# Altium PCB PCB.pcbdoc
Units mil, origin at the board's own origin, x right, y up, seen from the top; angles counter-clockwise.
Board outline 1574.8 x 2362.2 mil, 2 copper layers (Top Layer, Bottom Layer), stack 62.2 mil thick; 34 components, 25 nets, 135 pads, 34 vias.
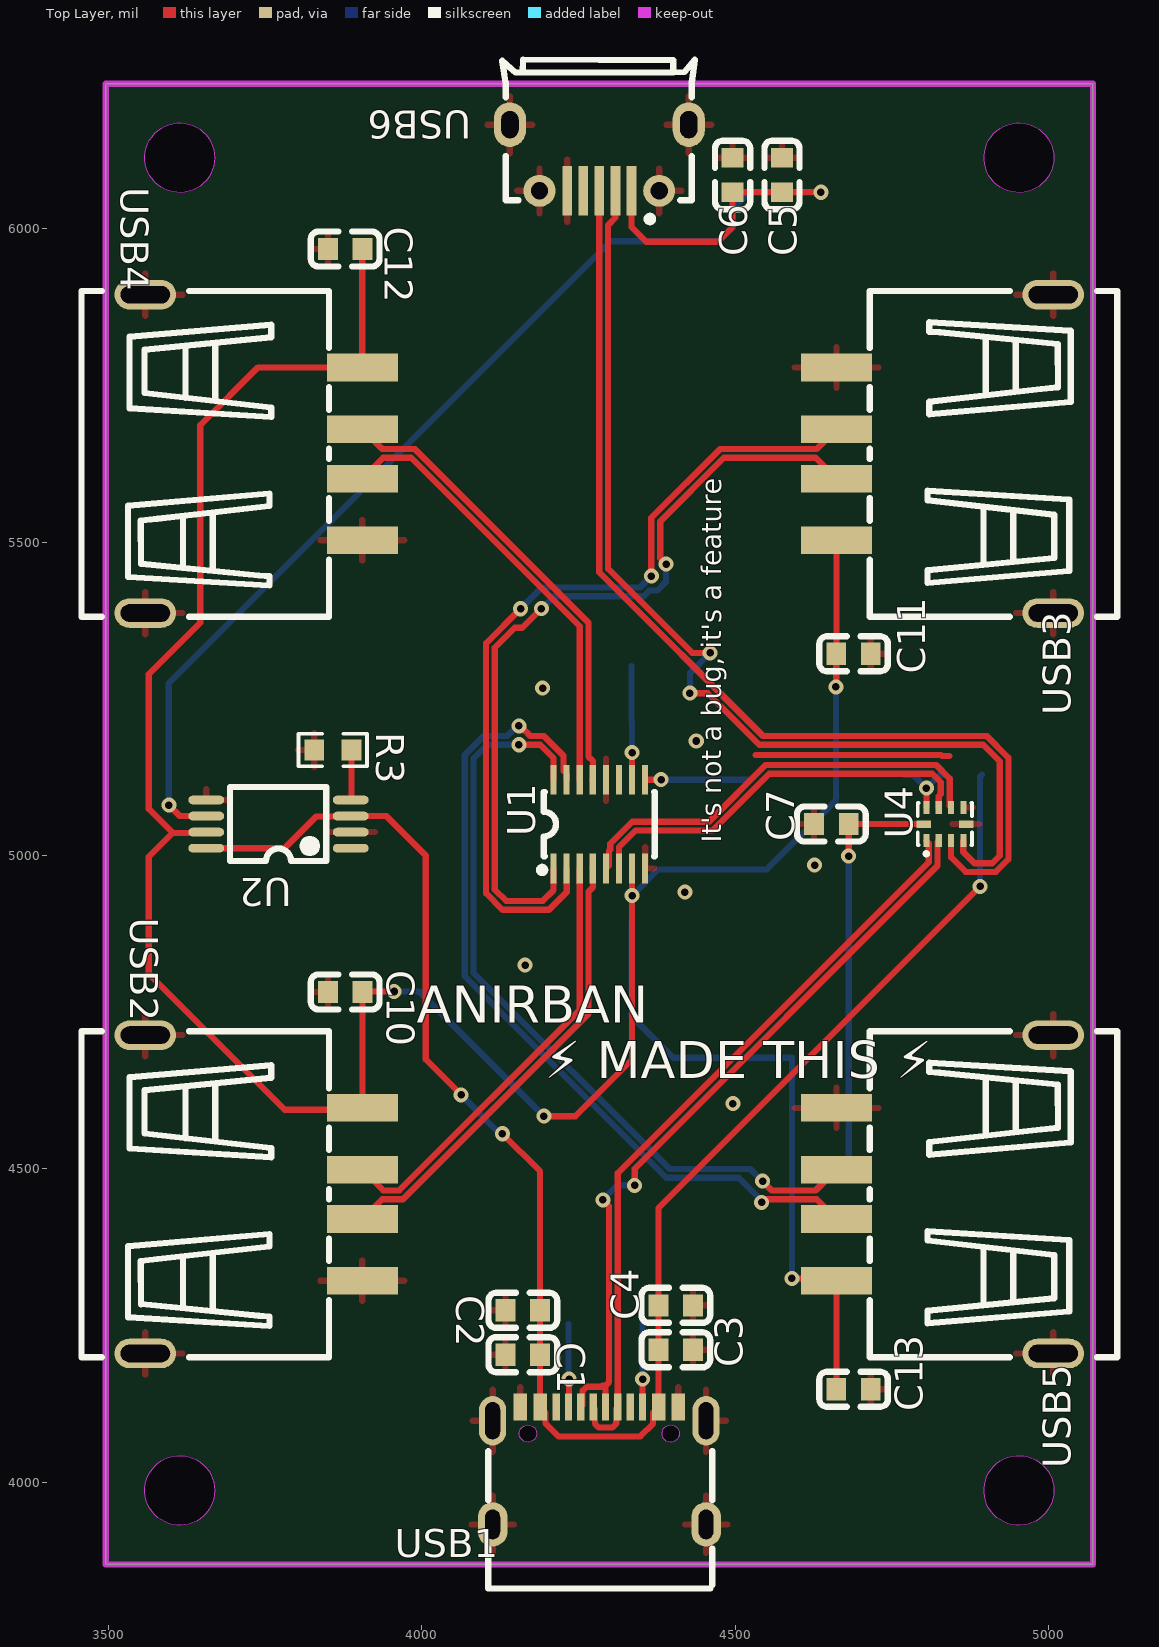
[diagram p0: Top Layer view]
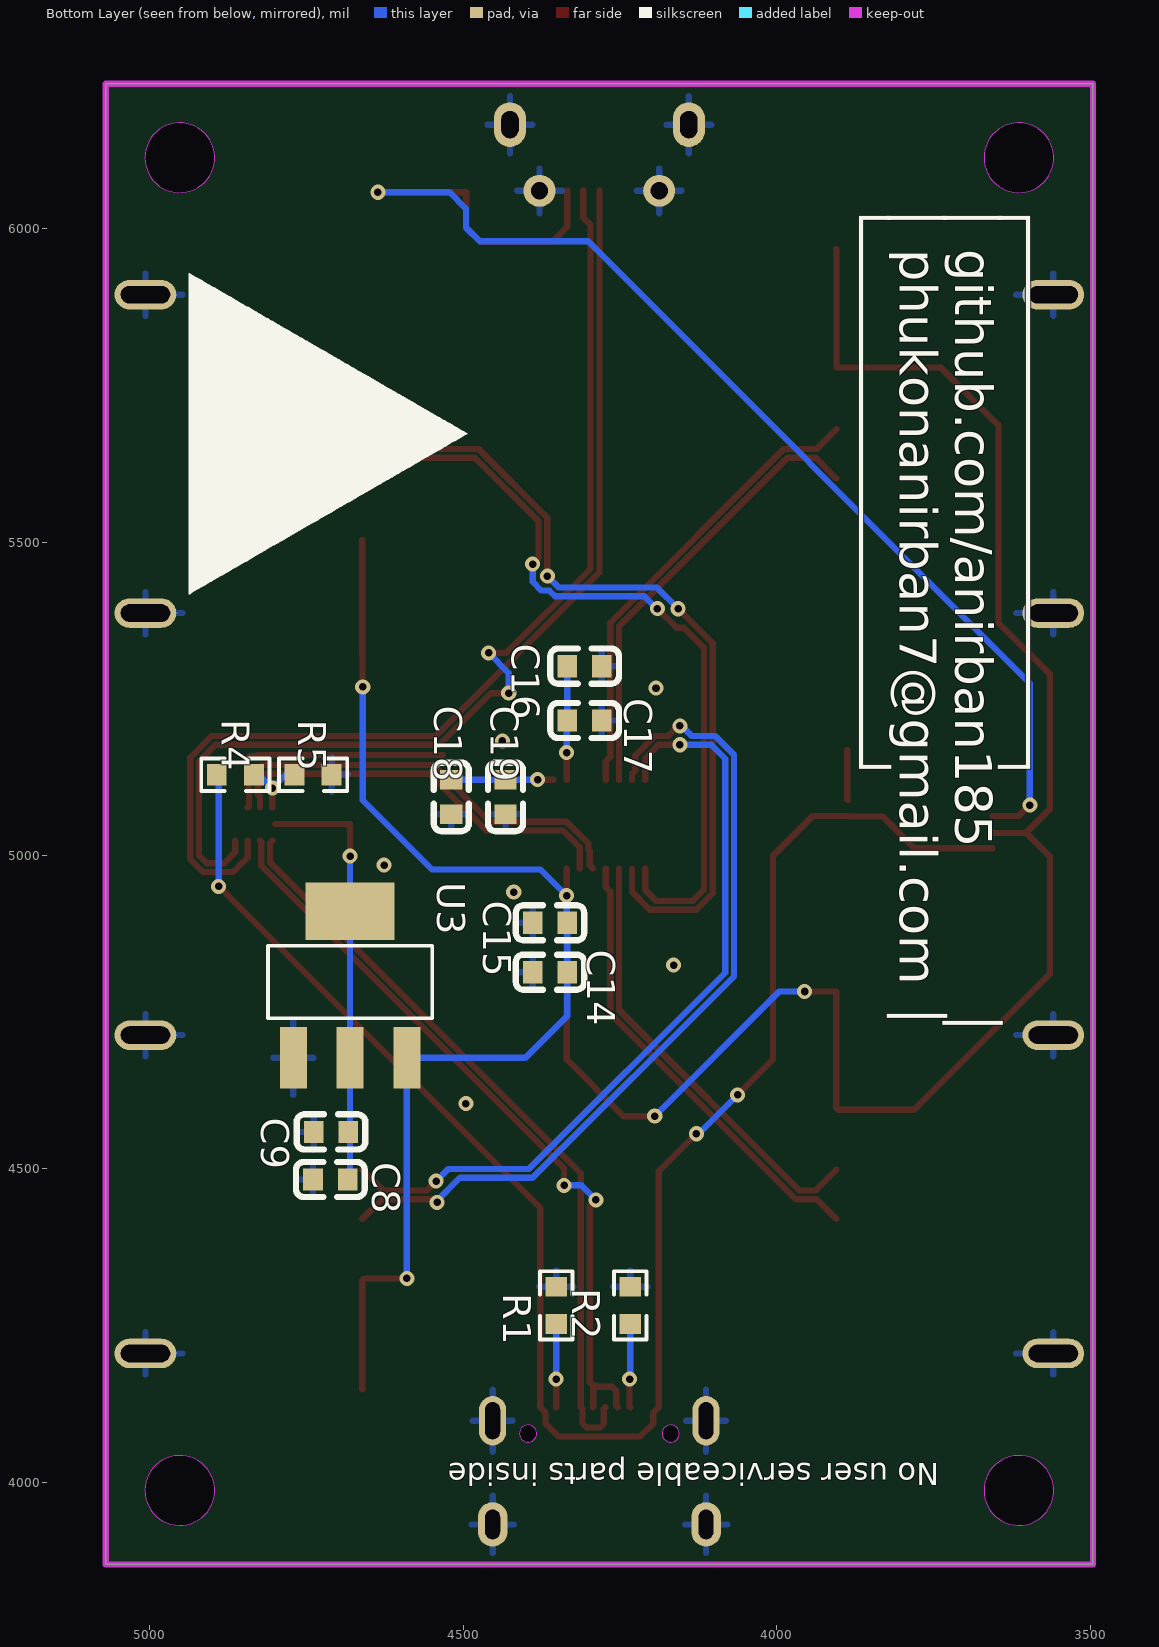
[diagram p1: Bottom Layer view, seen from below]

## Layer stack, top to bottom
Top Solder Mask Layer: solder mask 0.4, Dk 3.3
Top Layer: signal copper 1.4
Dielectric1: surface 59.4, FR4, Dk 4.5
Bottom Layer: signal copper 1.4
Bottom Solder Mask Layer: solder mask 0.4, Dk 3.3

## Board outline
3495.6,6231.3 3495.6,3869.1 5070.4,3869.1 5070.4,6231.3
cut-out: 3669.4,3987.2 3669,3980.6 3667.9,3974.1 3665.9,3967.8 3663.3,3961.7 3659.9,3956.1 3655.9,3950.8 3651.3,3946.1 3646.2,3941.9 3640.6,3938.4 3634.7,3935.6 3628.4,3933.5 3622,3932.1 3615.4,3931.5 3608.8,3931.7 3602.3,3932.7 3595.9,3934.4 3589.8,3936.9 3584,3940.1 3578.7,3943.9 3573.8,3948.4 3569.5,3953.4 3565.8,3958.9 3562.8,3964.7 3560.5,3970.9 3558.9,3977.3 3558.2,3983.9 3558.2,3990.5 3558.9,3997 3560.5,4003.4 3562.8,4009.6 3565.8,4015.5 3569.5,4021 3573.8,4026 3578.7,4030.4 3584,4034.3 3589.8,4037.4 3595.9,4039.9 3602.3,4041.7 3608.8,4042.6 3615.4,4042.8 3622,4042.2 3628.4,4040.9 3634.7,4038.8 3640.6,4035.9 3646.2,4032.4 3651.3,4028.3 3655.9,4023.5 3659.9,4018.3 3663.3,4012.6 3665.9,4006.6 3667.9,4000.2 3669,3993.8
cut-out: 5008,3987.2 5007.6,3980.6 5006.4,3974.1 5004.5,3967.8 5001.9,3961.7 4998.5,3956.1 4994.5,3950.8 4989.9,3946.1 4984.8,3941.9 4979.2,3938.4 4973.2,3935.6 4967,3933.5 4960.5,3932.1 4954,3931.5 4947.4,3931.7 4940.9,3932.7 4934.5,3934.4 4928.4,3936.9 4922.6,3940.1 4917.2,3943.9 4912.4,3948.4 4908.1,3953.4 4904.4,3958.9 4901.4,3964.7 4899.1,3970.9 4897.5,3977.3 4896.7,3983.9 4896.7,3990.5 4897.5,3997 4899.1,4003.4 4901.4,4009.6 4904.4,4015.5 4908.1,4021 4912.4,4026 4917.2,4030.4 4922.6,4034.3 4928.4,4037.4 4934.5,4039.9 4940.9,4041.7 4947.4,4042.6 4954,4042.8 4960.5,4042.2 4967,4040.9 4973.2,4038.8 4979.2,4035.9 4984.8,4032.4 4989.9,4028.3 4994.5,4023.5 4998.5,4018.3 5001.9,4012.6 5004.5,4006.6 5006.4,4000.2 5007.6,3993.8
cut-out: 5008,6113.2 5007.6,6106.6 5006.4,6100.1 5004.5,6093.8 5001.9,6087.7 4998.5,6082.1 4994.5,6076.8 4989.9,6072.1 4984.8,6067.9 4979.2,6064.4 4973.2,6061.6 4967,6059.4 4960.5,6058.1 4954,6057.5 4947.4,6057.7 4940.9,6058.7 4934.5,6060.4 4928.4,6062.9 4922.6,6066.1 4917.2,6069.9 4912.4,6074.4 4908.1,6079.4 4904.4,6084.8 4901.4,6090.7 4899.1,6096.9 4897.5,6103.3 4896.7,6109.9 4896.7,6116.5 4897.5,6123 4899.1,6129.4 4901.4,6135.6 4904.4,6141.5 4908.1,6146.9 4912.4,6151.9 4917.2,6156.4 4922.6,6160.2 4928.4,6163.4 4934.5,6165.9 4940.9,6167.6 4947.4,6168.6 4954,6168.8 4960.5,6168.2 4967,6166.9 4973.2,6164.8 4979.2,6161.9 4984.8,6158.4 4989.9,6154.2 4994.5,6149.5 4998.5,6144.3 5001.9,6138.6 5004.5,6132.5 5006.4,6126.2 5007.6,6119.7
cut-out: 3669.4,6113.2 3669,6106.6 3667.9,6100.1 3665.9,6093.8 3663.3,6087.7 3659.9,6082.1 3655.9,6076.8 3651.3,6072.1 3646.2,6067.9 3640.6,6064.4 3634.7,6061.6 3628.4,6059.4 3622,6058.1 3615.4,6057.5 3608.8,6057.7 3602.3,6058.7 3595.9,6060.4 3589.8,6062.9 3584,6066.1 3578.7,6069.9 3573.8,6074.4 3569.5,6079.4 3565.8,6084.8 3562.8,6090.7 3560.5,6096.9 3558.9,6103.3 3558.2,6109.9 3558.2,6116.5 3558.9,6123 3560.5,6129.4 3562.8,6135.6 3565.8,6141.5 3569.5,6146.9 3573.8,6151.9 3578.7,6156.4 3584,6160.2 3589.8,6163.4 3595.9,6165.9 3602.3,6167.6 3608.8,6168.6 3615.4,6168.8 3622,6168.2 3628.4,6166.9 3634.7,6164.8 3640.6,6161.9 3646.2,6158.4 3651.3,6154.2 3655.9,6149.5 3659.9,6144.3 3663.3,6138.6 3665.9,6132.5 3667.9,6126.2 3669,6119.7

## Design rules (kind name [scope] priority, off if disabled: settings)
BoardOutlineClearance copperThickness1oz [All] p0: genericclearance=10 ignorepadtopadclearanceinfootprint=FALSE except(0: Arc-SplitContinuation Track-SplitContinuation SMDPad-SplitContinuation THPad-SplitContinuation Via-SplitContinuation Fill-SplitContinuation Poly-SplitContinuation Region-SplitContinuation Text-SplitContinuation)
BoardOutlineClearance copperThickness2oz [All] p0: genericclearance=10 ignorepadtopadclearanceinfootprint=FALSE except(0: Arc-SplitContinuation Track-SplitContinuation SMDPad-SplitContinuation THPad-SplitContinuation Via-SplitContinuation Fill-SplitContinuation Poly-SplitContinuation Region-SplitContinuation Text-SplitContinuation)
BoardOutlineClearance otherClearance [All] p0: genericclearance=10 ignorepadtopadclearanceinfootprint=FALSE except(0: Arc-SplitContinuation Track-SplitContinuation SMDPad-SplitContinuation THPad-SplitContinuation Via-SplitContinuation Fill-SplitContinuation Poly-SplitContinuation Region-SplitContinuation Text-SplitContinuation)
Clearance copperThickness1oz [All] p1: gap=7 ignorepadtopadclearanceinfootprint=FALSE
Clearance copperThickness2oz [All] p1: gap=7 ignorepadtopadclearanceinfootprint=FALSE
Clearance otherClearance [All] p1: gap=7 ignorepadtopadclearanceinfootprint=FALSE
DiffPairsRouting differentialPair [All] p1: maxuncoupledlength=10 minlimit=6 maxlimit=Infinity mostfreqgap=6 toplayer_minwidth=5 toplayer_prefwidth=10 toplayer_maxwidth=100 bottomlayer_minwidth=5 bottomlayer_prefwidth=10 bottomlayer_maxwidth=100
PasteMaskExpansion pasteMaskExpansion [All] p1: expansion=0
PlaneConnect innerPlane [All] p1: planeconnectstyle=Relief reliefexpansion=20 reliefentries=4 reliefconductorwidth=10 reliefairgap=10
PolygonConnect copperRegion [All] p1: connectstyle=Relief reliefentries=4 reliefconductorwidth=10 polygonreliefangle="90 Angle" airgapwidth=10
RoutingVias viaSize [All] p1: viastyle="Through Hole" holewidth=12.0078 minholewidth=11.811 maxholewidth=248.0314 width=12.0078 minwidth=11.811 maxwidth=248.0314
SolderMaskExpansion solderMaskExpansion [IsVia] p1: useseparateexpansions=TRUE expansion=-1000 expansionbottom=-1000
SolderMaskExpansion solderMaskExpansion [All] p2: useseparateexpansions=TRUE expansion=2 expansionbottom=2
Width copperThickness1oz [All] p1: maxlimit=100 minlimit=5 preferedwidth=10
Width copperThickness2oz [All] p1: maxlimit=100 minlimit=8 preferedwidth=10

## Components (designator, comment, footprint, x,y, rotation, side; value= is the part's Value field where it differs from the comment)
C1 "1uF" C0603#1 4161,4203.7 r0 top
C2 "100uF" C0603#1 4161,4274.6 r0 top
C3 "1uF" C0603#2 4405.1,4211.6 r180 top
C4 "100uF" C0603#2 4405.1,4282.4 r180 top
C5 "1uF" C0603#3 4574.4,6085.6 r270 top
C6 "100uF" C0603#3 4495.6,6085.6 r270 top
C7 "100nF" C0603#2 4653.1,5050.2 r0 top
C8 "1uF" C0603#2 4712.2,4483.2 r180 bottom
C9 "100uF" C0603#1 4711.1,4559.1 r180 bottom
C10 "100nF" C0603#2 3877.5,4782.4 r0 top
C11 "100nF" C0603#1 4688.5,5321.8 r180 top
C12 "100nF" C0603#2 3877.5,5967.5 r0 top
C13 "100nF" C0603#1 4688.5,4148.6 r180 top
C14 "1uF" C0603#2 4361.8,4813.9 r180 bottom
C15 "100uF" C0603#2 4361.8,4892.7 r180 bottom
C16 "1uF" C0603#1 4306.7,5302.1 r0 bottom
C17 "100uF" C0603#1 4306.7,5215.5 r0 bottom
C18 "1uF" C0603#1 4432.6,5093.5 r90 bottom
C19 "100uF" C0603#1 4519.3,5093.5 r90 bottom
R1 "10K" R0603#1 4351.9,4282.4 r270 bottom
R2 "10K" R0603#1 4233.8,4282.4 r270 bottom
R3 "10K" R0603#2 3857.8,5168.3 r0 top
R4 "10K" R0603#2 4863.7,5128.9 r0 bottom
R5 "20K" R0603#2 4739.7,5128.9 r0 bottom
U1 "SL2.1s" SSOP-16_L4.6-W2.6-P0.53-LS4.0-BL 4283,5050.2 r0 top
U2 "TPS2113APWR" TSSOP-8_L4.4-W3.0-P0.65-LS6.4-BL 3771.2,5050.2 r90 top
U3 "AMS1117-3.3" SOT-223-3_L6.5-W3.4-P2.30-LS7.0-BR 4680.7,4794.3 r270 bottom
U4 "TS3USB221RSER" UQFN-10_L2.0-W1.5-P0.50-BL 4834.2,5050.2 r0 top
USB1 "TYPE-C 16PIN 2MD(073)" USB-C-SMD_TYPE-C-16PIN-2MD-073 4283,4026.5 r0 top
USB2 "10.0 QHHTZB6.3" USB-A-TH_10.0QHHTZB6.3#1 3731.9,4459.6 r270 top
USB3 "10.0 QHHTZB6.3" USB-A-TH_10.0QHHTZB6.3#2 4834.2,5640.7 r90 top
USB4 "10.0 QHHTZB6.3" USB-A-TH_10.0QHHTZB6.3#3 3731.9,5640.7 r270 top
USB5 "10.0 QHHTZB6.3" USB-A-TH_10.0QHHTZB6.3#4 4834.2,4459.6 r90 top
USB6 "MicroXNJ" MICRO-USB-SMD_MICROXNJ_1 4283,6113.2 r90 top

## Footprints (in the part's own frame and the unit in brackets; to place one, negate y for a bottom-side part, rotate by r counter-clockwise, add the part's x,y. Pads: shape width x height; smd on the part's side, far side on the other; paste and mask are expansions set on the pad)
C0603#1 [mil]
  rect 31.5x35.4 smd: 1(-27.6,0) 2(27.5,0)
  silkscreen extent -55,-28 55,28
C0603#2 [mil]
  rect 31.5x35.4 smd: 1(-27.5,0) 2(27.6,0)
  silkscreen extent -55,-28 55,28
C0603#3 [mil]
  rect 31.5x35.4 smd: 1(-27.6,0) 2(27.6,0)
  silkscreen extent -55,-28 55,28
MICRO-USB-SMD_MICROXNJ_1 [mil]
  rect 78.7x15.7 smd paste-3937 mask+2: 1(-52.5,-51.2) 2(-52.5,-25.6) 3(-52.5,0) 4(-52.5,25.6) 5(-52.5,51.1)
  round 51.2 hole 27.6 paste+0 mask+2: 6(-52.8,95.4) 9(-52.8,-95.5)
  oval 70.9x51.2 hole 27.6 slot 43.3 at 0 deg paste+0 mask+2: 7(52.7,142.7) 8(52.7,-142.7)
  Inner2 lines w3.9: -164.9,-310.9 cw(c-162.9,-310.9) -160.9,-310.9 cw(c-162.9,-310.9) -164.9,-310.9
  silkscreen extent -103,-152 157,155
R0603#1 [mil]
  rect 31.8x34 smd paste-3937 mask+2: 1(-29.7,0) 2(29.6,0)
  silkscreen extent -55,-26 55,26
R0603#2 [mil]
  rect 31.8x34 smd paste-3937 mask+2: 1(-29.6,0) 2(29.7,0)
  silkscreen extent -54,-26 55,26
SOT-223-3_L6.5-W3.4-P2.30-LS7.0-BR [mil]
  rect 98.4x43.3 smd: 1(117,-90.5) 2(117,0) 3(117,90.6)
  rect 92.1x141.7 smd: 4(-116.9,0)
  silkscreen extent -62,-131 54,131
SSOP-16_L4.6-W2.6-P0.53-LS4.0-BL [mil]
  rect 9.8x47.2 smd paste+0 mask+2: 1(-73,-70.9) 2(-52.1,-70.9) 3(-31.3,-70.9) 4(-10.4,-70.9) 5(10.5,-70.9) 6(31.3,-70.9) 7(52.2,-70.9) 8(73.1,-70.9) 9(73.1,70.8) 10(52.2,70.8) 11(31.3,70.8) 12(10.5,70.8) 13(-10.4,70.8) 14(-31.3,70.8) 15(-52.1,70.8) 16(-73,70.8)
  silkscreen extent -96,-78 89,51
TSSOP-8_L4.4-W3.0-P0.65-LS6.4-BL [mil]
  oval 13.9x57.2 smd: 1(-38.4,-115.3) 2(-12.8,-115.3) 3(12.8,-115.3) 4(38.4,-115.3) 5(38.4,115.2) 6(12.8,115.2) 7(-12.8,115.2) 8(-38.4,115.2)
  silkscreen extent -59,-76 59,77
UQFN-10_L2.0-W1.5-P0.50-BL [mil]
  rect 9.8x20.7 smd: 1(-29.5,-26.6) 2(-9.8,-26.6) 3(9.9,-26.6) 4(29.5,-26.6) 6(29.5,26.5) 7(9.9,26.5) 8(-9.8,26.5) 9(-29.5,26.5)
  rect 22.8x11.8 smd: 5(33.9,0) 10(-33.8,0)
  silkscreen extent -43,-50 43,33
USB-A-TH_10.0QHHTZB6.3#1 [mil]
  rect 44.1x113.4 smd paste-3937 mask+2: 1(-137.8,173) 2(-39.4,173) 3(39.4,173) 4(137.8,173)
  oval 47.2x98.4 hole 27.6 slot 78.7 at 90 deg: 5(-253.9,-173.1) 6(253.9,-173.1)
  silkscreen extent -260,-275 260,120
USB-A-TH_10.0QHHTZB6.3#2 [mil]
  rect 44.1x113.4 smd paste-3937 mask+2: 1(-137.8,173) 2(-39.4,173) 3(39.4,173) 4(137.8,173)
  oval 47.2x98.4 hole 27.6 slot 78.7 at 90 deg: 5(-253.9,-173) 6(254,-173)
  silkscreen extent -260,-275 260,120
USB-A-TH_10.0QHHTZB6.3#3 [mil]
  rect 44.1x113.4 smd paste-3937 mask+2: 1(-137.8,173) 2(-39.4,173) 3(39.4,173) 4(137.8,173)
  oval 47.2x98.4 hole 27.6 slot 78.7 at 90 deg: 5(-254,-173.1) 6(253.9,-173.1)
  silkscreen extent -260,-275 260,120
USB-A-TH_10.0QHHTZB6.3#4 [mil]
  rect 44.1x113.4 smd paste-3937 mask+2: 1(-137.8,173) 2(-39.4,173) 3(39.4,173) 4(137.8,173)
  oval 47.2x98.4 hole 27.6 slot 78.7 at 90 deg: 5(-253.9,-173) 6(253.9,-173)
  silkscreen extent -260,-275 260,120
USB-C-SMD_TYPE-C-16PIN-2MD-073 [mil]
  oval 47.2x70.9 hole 23.6 slot 47.2 at 90 deg paste+0 mask+2: 13(-170.2,-93.5) 14(170.3,-93.5)
  oval 43.3x78.7 hole 23.6 slot 59.1 at 90 deg paste+0 mask+2: 13(-170.2,71.9) 14(170.3,71.9)
  rect 21.7x43.3 smd paste+0 mask+2: A1B12(-125.9,93.5) A4B9(-94.5,93.5) B1A12(126,93.5) B4A9(94.5,93.5)
  rect 11.8x43.3 smd paste+0 mask+2: A5(-49.2,93.5) A6(-9.8,93.5) A7(9.9,93.5) A8(49.2,93.5) B5(68.9,93.5) B6(29.6,93.5) B7(-29.5,93.5) B8(-68.9,93.5)
  Board Outline Layer lines w0.1: -127.4,49.8 -126.7,46.7 -125.3,43.8 -123.2,41.4 -120.6,39.5 -117.7,38.2 -114.5,37.7 -111.4,37.8 -108.3,38.8 -105.5,40.4 -103.2,42.6 -101.4,45.2 -100.3,48.2 -100,51.4 -100.3,54.6 -101.4,57.6 -103.2,60.3 -105.5,62.5 -108.3,64.1 -111.4,65 -114.5,65.2 -117.7,64.6 -120.6,63.4 -123.2,61.4 -125.3,59 -126.7,56.1 -127.4,53 -127.4,49.8 ; 100.1,49.8 100.9,46.7 102.3,43.8 104.4,41.4 106.9,39.5 109.9,38.2 113,37.7 116.2,37.8 119.3,38.8 122,40.4 124.4,42.6 126.1,45.2 127.2,48.2 127.6,51.4 127.2,54.6 126.1,57.6 124.4,60.3 122,62.5 119.3,64.1 116.2,65 113,65.2 109.9,64.6 106.9,63.4 104.4,61.4 102.3,59 100.9,56.1 100.1,53 100.1,49.8
  Board Outline Layer region: -100,51.4 -100.3,48.2 -101.4,45.2 -103.2,42.6 -105.5,40.4 -108.3,38.8 -111.4,37.8 -114.5,37.7 -117.7,38.2 -120.6,39.5 -123.2,41.4 -125.3,43.8 -126.7,46.7 -127.4,49.8 -127.4,53 -126.7,56.1 -125.3,59 -123.2,61.4 -120.6,63.4 -117.7,64.6 -114.5,65.2 -111.4,65 -108.3,64.1 -105.5,62.5 -103.2,60.3 -101.4,57.6 -100.3,54.6
  Board Outline Layer region: -100,51.4 -100.3,48.2 -101.4,45.2 -103.2,42.6 -105.5,40.4 -108.3,38.8 -111.4,37.8 -114.5,37.7 -117.7,38.2 -120.6,39.5 -123.2,41.4 -125.3,43.8 -126.7,46.7 -127.4,49.8 -127.4,53 -126.7,56.1 -125.3,59 -123.2,61.4 -120.6,63.4 -117.7,64.6 -114.5,65.2 -111.4,65 -108.3,64.1 -105.5,62.5 -103.2,60.3 -101.4,57.6 -100.3,54.6
  Board Outline Layer region: 127.6,51.4 127.2,48.2 126.1,45.2 124.4,42.6 122,40.4 119.3,38.8 116.2,37.8 113,37.7 109.9,38.2 106.9,39.5 104.4,41.4 102.3,43.8 100.9,46.7 100.1,49.8 100.1,53 100.9,56.1 102.3,59 104.4,61.4 106.9,63.4 109.9,64.6 113,65.2 116.2,65 119.3,64.1 122,62.5 124.4,60.3 126.1,57.6 127.2,54.6
  Board Outline Layer region: 127.6,51.4 127.2,48.2 126.1,45.2 124.4,42.6 122,40.4 119.3,38.8 116.2,37.8 113,37.7 109.9,38.2 106.9,39.5 104.4,41.4 102.3,43.8 100.9,46.7 100.1,49.8 100.1,53 100.9,56.1 102.3,59 104.4,61.4 106.9,63.4 109.9,64.6 113,65.2 116.2,65 119.3,64.1 122,62.5 124.4,60.3 126.1,57.6 127.2,54.6
  Multi-Layer board cut-out: -100,51.4 -100.3,48.2 -101.4,45.2 -103.2,42.6 -105.5,40.4 -108.3,38.8 -111.4,37.8 -114.5,37.7 -117.7,38.2 -120.6,39.5 -123.2,41.4 -125.3,43.8 -126.7,46.7 -127.4,49.8 -127.4,53 -126.7,56.1 -125.3,59 -123.2,61.4 -120.6,63.4 -117.7,64.6 -114.5,65.2 -111.4,65 -108.3,64.1 -105.5,62.5 -103.2,60.3 -101.4,57.6 -100.3,54.6
  Multi-Layer board cut-out: 127.6,51.4 127.2,48.2 126.1,45.2 124.4,42.6 122,40.4 119.3,38.8 116.2,37.8 113,37.7 109.9,38.2 106.9,39.5 104.4,41.4 102.3,43.8 100.9,46.7 100.1,49.8 100.1,53 100.9,56.1 102.3,59 104.4,61.4 106.9,63.4 109.9,64.6 113,65.2 116.2,65 119.3,64.1 122,62.5 124.4,60.3 126.1,57.6 127.2,54.6
  silkscreen extent -177,-196 180,24

## Via types
v1: diameter 24, hole 12, Top Layer to Bottom Layer, 34 vias

## Nets (pads, with @x,y where several pads share a name; then routed paths per layer and width w, separated by ;. In a path a pad name is that pad's centre, name@x,y a point inside that pad or via, vN(x,y) a via of type N, cw(c..) or ccw(c..) an arc to the next point about the centre after c; other vN are vias at no path point)
$1N8: R1.2 USB1.B5 | length 132.8
  Top Layer w10: USB1.B5 v1(4351.9,4164.7)
  Bottom Layer w10: v1(4351.9,4164.7) R1.2
$1N10: R2.2 USB1.A5 | length 133.6
  Top Layer w10: USB1.A5 4234.8,4121.1 v1(4234.8,4164.7)
  Bottom Layer w10: R2.2 4233.8,4165.7 v1(4234.8,4164.7)
$1N34: R3.2 U2.4 | length 80.1
  Top Layer w10: U2.4 3887.5,5089.6 R3.2
$1N46: R4.1 R5.2 U4.9 | length 113.3
  Top Layer w10: U4.9 4804.8,5076.8 v1(4804.8,5107.5)
  Bottom Layer w10: R5.2 4783.4,5128.9 v1(4804.8,5107.5) 4826.2,5128.9 R4.1
$1N103: C16.2 C17.2 U1.10 | length 181.5
  Top Layer w10: U1.10 v1(4335.2,5164.3)
  Bottom Layer w10: C16.2 C17.2 4335.2,5214.5 v1(4335.2,5164.3)
$1N104: C18.2 C19.2 U1.9 | length 163.2
  Top Layer w10: U1.9 v1(4381.5,5121)
  Bottom Layer w10: v1(4381.5,5121) C18.2 C19.2
+3.3V: C7.2 C8.2 C9.2 U3.2 U3.4 U4.10 | length 688.3
  Top Layer w10: v1(4680.7,4999) C7.2 U4.10
  Bottom Layer w10: v1(4680.7,4999) U3.4 U3.2 4680.7,4487.2 C8.2
+5V: C10.2 C11.2 C12.2 C13.2 C14.2 C15.2 U1.7 U2.7 U3.3 USB2.1 USB3.1 USB4.1 USB5.1 | length 4829.5
  Top Layer w10: U2.7 3654.7,5036.1 3602.4,5036.1 ; C12.2 3904.9,5967.3 USB4.1 3738.4,5778.5 3646.5,5686.7 3646.5,5371.4 3564.2,5289.1 3564.2,5074.3 3602.4,5036.1 ; v1(3955.7,4783.1) 3905.7,4783.1 C10.2 3905.1,4597.6 USB2.1 3901.9,4594.4 3781.1,4594.4 3564.2,4811.2 3564.2,4998 3602.4,5036.1 ; v1(4194.7,4584.3) 4244.9,4584.3 4335.2,4674.7 v1(4335.2,4936) U1.7 ; v1(4590.2,4325.3) 4657.7,4325.3 USB5.1 4661.2,4148.8 C13.2 ; v1(4660.5,5269) 4661,5269.5 C11.2 4661.2,5322 USB3.1
  Bottom Layer w10: v1(3955.7,4783.1) 3995.9,4783.1 v1(4194.7,4584.3) ; v1(4590.2,4325.3) 4590.2,4677.2 U3.3 4400.9,4677.3 4334.2,4744 C14.2 C15.2 4335.2,4893.7 v1(4335.2,4936) 4377.1,4977.9 4550.1,4977.9 4660.5,5088.3 v1(4660.5,5269)
DN: U1.5 U4.7 | length 692
  Top Layer w10: U1.5 4298.4,4984.3 4298.4,5007.5 4300.3,5009.4 4300.3,5019 4335.5,5054.1 4457.9,5054.1 4548.3,5144.5 4820.1,5144.5 4841.8,5122.8 4841.8,5079 U4.7
DN1: U1.3 USB2.2 | length 705.5
  Top Layer w10: USB2.2 3938,4465.8 3964,4465.8 4251.7,4753.6 U1.3
DN2: U1.1 USB3.2 | length 1282.5
  Top Layer w10: v1(4190.4,5393.9) 4159.8,5363.3 4148.2,5363.3 4116.3,5331.5 4116.3,4945.5 4134.2,4927.6 4192.7,4927.6 4210,4945 U1.1 ; v1(4389.4,5464.7) 4380,5474.1 4380,5532.9 4481.6,5634.5 4628,5634.5 USB3.2
  Bottom Layer w10: v1(4190.4,5393.9) 4191.4,5393.9 4211.2,5413.6 4353.7,5413.6 4362.8,5422.7 4375.5,5422.7 4389.4,5436.6 v1(4389.4,5464.7)
DN3: U1.15 USB5.2 | length 1349
  Top Layer w10: v1(4154.5,5206.7) 4161.5,5199.7 4164.1,5199.7 4173,5190.7 4194.5,5190.7 4225.9,5159.2 4225.9,5135.3 4230.9,5130.3 U1.15 ; v1(4542,4446.7) 4547,4451.7 4629.7,4451.7 USB5.2
  Bottom Layer w10: v1(4154.5,5206.7) 4152,5206.7 4136,5190.7 4098.5,5190.7 4068.2,5160.4 4068.2,4807.4 4389.7,4486 4505.5,4486 4542,4449.4 v1(4542,4446.7)
DN4: U1.13 USB4.2 | length 742.3
  Top Layer w10: USB4.2 3936.5,5648.5 3988.6,5648.5 4265.7,5371.4 4265.7,5157.8 4273,5150.6 4273,5121.4 U1.13
DN-C: U4.2 USB1.A7 USB1.B7 | length 1215.6
  Top Layer w10: USB1.B7 4256.3,4122.8 4256.3,4146.3 4262.7,4152.7 4286.1,4152.7 4287.9,4154.5 4292.9,4154.5 ; v1(4288.6,4450.8) 4298.5,4440.8 4298.5,4160.1 4292.9,4154.5 ; USB1.A7 4292.9,4154.5 ; v1(4339.3,4473.9) 4339.3,4500.3 4822.5,4983.5 4822.5,5021.7 U4.2
  Bottom Layer w10: v1(4288.6,4450.8) 4311.7,4473.9 v1(4339.3,4473.9)
DN-M: U4.4 USB6.2 | length 1681.7
  Top Layer w10: USB6.2 4308.6,6017.5 4297,6005.9 4297,5457.5 4431.4,5323.2 v1(4459.7,5323.2) ; v1(4427.6,5259) 4456,5259 4538.2,5176.7 4895.4,5176.7 4921.6,5150.5 4921.6,4999.7 4909.6,4987.8 4881.5,4987.8 4863.7,5005.6 U4.4
  Bottom Layer w10: v1(4427.6,5259) 4427.6,5291.1 v1(4459.7,5323.2)
DP: U1.6 U4.8 | length 643.3
  Top Layer w10: U1.6 4314.3,5013.2 4341.3,5040.1 4463.7,5040.1 4554.1,5130.5 4814.3,5130.5 4827.8,5117 4827.8,5098 4824.4,5094.6 U4.8
DP1: U1.4 USB2.3 | length 731.2
  Top Layer w10: USB2.3 3936.5,4451.8 3969.8,4451.8 4265.7,4747.8 4265.7,4942.5 4273,4949.8 4273,4978.9 U1.4
DP2: U1.2 USB3.3 | length 1342.4
  Top Layer w10: v1(4157.3,5393.7) 4102.3,5338.7 4102.3,4939.7 4128.4,4913.6 4202.7,4913.6 4230.9,4941.8 U1.2 ; v1(4366,5445.7) 4366,5538.7 4475.8,5648.5 4629.6,5648.5 USB3.3
  Bottom Layer w10: v1(4157.3,5393.7) 4191.3,5427.6 4347.9,5427.6 v1(4366,5445.7)
DP3: U1.16 USB5.3 | length 1258.3
  Top Layer w10: v1(4154.5,5176.7) 4188.7,5176.7 4210,5155.3 U1.16 ; v1(4543.5,4480.5) 4558.3,4465.7 4627.9,4465.7 USB5.3
  Bottom Layer w10: v1(4154.5,5176.7) 4104.3,5176.7 4082.2,5154.6 4082.2,4813.2 4395.5,4500 4524,4500 v1(4543.5,4480.5)
DP4: U1.14 USB4.3 | length 716.6
  Top Layer w10: USB4.3 3938,5634.5 3982.9,5634.5 4251.7,5365.6 U1.14
DP-C: U4.1 USB1.A6 USB1.B6 | length 1204.4
  Top Layer w10: USB1.A6 4276,4117.2 4276,4093.8 4282.4,4087.4 4303.3,4087.4 4309.8,4093.8 4309.8,4117.3 USB1.B6 4312.6,4493.4 4808.5,4989.3 4808.5,5019.8 U4.1
DP-M: U4.3 USB6.3 | length 1682.3
  Top Layer w10: USB6.3 4283,5451.7 4544.1,5190.7 4901.2,5190.7 4935.6,5156.3 4935.6,4993.9 4915.4,4973.8 4867.4,4973.8 4844.1,4997.1 U4.3
GND: C1.1 C2.1 C3.1 C4.1 C5.1 C6.1 C7.1 C8.1 C9.1 C10.1 C11.1 C12.1 C13.1 C14.1 C15.1 C16.1 C17.1 C18.1 C19.1 R1.1 R2.1 R3.1 R5.1 U1.8 U1.12 U2.2 U2.5 U3.1 U4.5 U4.6 USB1.13 USB1.14 USB1.A1B12 USB1.B1A12 USB2.4 USB2.5 USB2.6 USB3.4 USB3.5 USB3.6 USB4.4 USB4.5 USB4.6 USB5.4 USB5.5 USB5.6 USB6.5 USB6.6 USB6.7 USB6.8 USB6.9 | length 309.7
  Top Layer w10: 4532.3,5160.4 4532.4,5160.5 4827.9,5160.5 4829.9,5158.6 4841.2,5158.6
  other v1: 4495.9,4604.4 4164.6,4825.3 4419.6,4941.7 4626.3,4984.6 4437.6,5182.7 4192.7,5267
VBUS-C: C1.2 C2.2 C3.2 C4.2 R4.2 U2.3 U2.8 USB1.A4B9 USB1.B4A9 | length 2825.8
  Top Layer w10: U2.8 3780.8,5011.8 3831.3,5062.2 3885.7,5062.2 U2.3 3942.9,5063 4005.9,5000 4005.9,4674.7 v1(4062.4,4618.3) ; v1(4128.4,4556.2) 4188.5,4496.1 C2.2 C1.2 USB1.A4B9 4197.2,4111.3 4197.2,4093.8 4217.7,4073.4 4348.4,4073.4 4368.8,4093.8 4368.8,4111.3 USB1.B4A9 C3.2 C4.2 4377.5,4437.9 v1(4890.4,4950.8)
  Bottom Layer w10: v1(4062.4,4618.3) 4124.4,4556.2 v1(4128.4,4556.2) ; v1(4890.4,4950.8) 4890.4,5125.9 R4.2
VBUS-M: C5.2 C6.2 U2.6 USB6.1 | length 2078.4
  Top Layer w10: v1(3596.3,5080.3) 3613.7,5063 U2.6 ; USB6.1 4334.2,6002.9 4357.8,5979.3 4472,5979.3 4495.6,6002.9 C6.2 C5.2 4574.4,6058.1 v1(4636.4,6058.1)
  Bottom Layer w10: v1(3596.3,5080.3) 3596.3,5275 4301.1,5979.8 4473.8,5979.8 4495.9,6001.9 4495.9,6032 4522,6058.1 v1(4636.4,6058.1)
pads on no net: U1.11 U2.1 USB1.A8 USB1.B8 USB6.4

## Polygon pours and split planes (outlines as drawn)
GND on Bottom Layer (solid, pour order 2): 3172.7,6548 3172.7,3351.5 5461.7,3351.5 5461.7,6548
GND on Top Layer (solid, pour order 2): 3000,6662.5 3000,3351.5 5634.3,3351.5 5634.3,6662.5

## Keep-outs
Board Outline Layer:
  region: 3669.4,3987.2 3669,3980.6 3667.9,3974.1 3665.9,3967.8 3663.3,3961.7 3659.9,3956.1 3655.9,3950.8 3651.3,3946.1 3646.2,3941.9 3640.6,3938.4 3634.7,3935.6 3628.4,3933.5 3622,3932.1 3615.4,3931.5 3608.8,3931.7 3602.3,3932.7 3595.9,3934.4 3589.8,3936.9 3584,3940.1 3578.7,3943.9 3573.8,3948.4 3569.5,3953.4 3565.8,3958.9 3562.8,3964.7 3560.5,3970.9 3558.9,3977.3 3558.2,3983.9 3558.2,3990.5 3558.9,3997 3560.5,4003.4 3562.8,4009.6 3565.8,4015.5 3569.5,4021 3573.8,4026 3578.7,4030.4 3584,4034.3 3589.8,4037.4 3595.9,4039.9 3602.3,4041.7 3608.8,4042.6 3615.4,4042.8 3622,4042.2 3628.4,4040.9 3634.7,4038.8 3640.6,4035.9 3646.2,4032.4 3651.3,4028.3 3655.9,4023.5 3659.9,4018.3 3663.3,4012.6 3665.9,4006.6 3667.9,4000.2 3669,3993.8
  region: 3669.4,3987.2 3669,3980.6 3667.9,3974.1 3665.9,3967.8 3663.3,3961.7 3659.9,3956.1 3655.9,3950.8 3651.3,3946.1 3646.2,3941.9 3640.6,3938.4 3634.7,3935.6 3628.4,3933.5 3622,3932.1 3615.4,3931.5 3608.8,3931.7 3602.3,3932.7 3595.9,3934.4 3589.8,3936.9 3584,3940.1 3578.7,3943.9 3573.8,3948.4 3569.5,3953.4 3565.8,3958.9 3562.8,3964.7 3560.5,3970.9 3558.9,3977.3 3558.2,3983.9 3558.2,3990.5 3558.9,3997 3560.5,4003.4 3562.8,4009.6 3565.8,4015.5 3569.5,4021 3573.8,4026 3578.7,4030.4 3584,4034.3 3589.8,4037.4 3595.9,4039.9 3602.3,4041.7 3608.8,4042.6 3615.4,4042.8 3622,4042.2 3628.4,4040.9 3634.7,4038.8 3640.6,4035.9 3646.2,4032.4 3651.3,4028.3 3655.9,4023.5 3659.9,4018.3 3663.3,4012.6 3665.9,4006.6 3667.9,4000.2 3669,3993.8
  region: 5008,3987.2 5007.6,3980.6 5006.4,3974.1 5004.5,3967.8 5001.9,3961.7 4998.5,3956.1 4994.5,3950.8 4989.9,3946.1 4984.8,3941.9 4979.2,3938.4 4973.2,3935.6 4967,3933.5 4960.5,3932.1 4954,3931.5 4947.4,3931.7 4940.9,3932.7 4934.5,3934.4 4928.4,3936.9 4922.6,3940.1 4917.2,3943.9 4912.4,3948.4 4908.1,3953.4 4904.4,3958.9 4901.4,3964.7 4899.1,3970.9 4897.5,3977.3 4896.7,3983.9 4896.7,3990.5 4897.5,3997 4899.1,4003.4 4901.4,4009.6 4904.4,4015.5 4908.1,4021 4912.4,4026 4917.2,4030.4 4922.6,4034.3 4928.4,4037.4 4934.5,4039.9 4940.9,4041.7 4947.4,4042.6 4954,4042.8 4960.5,4042.2 4967,4040.9 4973.2,4038.8 4979.2,4035.9 4984.8,4032.4 4989.9,4028.3 4994.5,4023.5 4998.5,4018.3 5001.9,4012.6 5004.5,4006.6 5006.4,4000.2 5007.6,3993.8
  region: 5008,3987.2 5007.6,3980.6 5006.4,3974.1 5004.5,3967.8 5001.9,3961.7 4998.5,3956.1 4994.5,3950.8 4989.9,3946.1 4984.8,3941.9 4979.2,3938.4 4973.2,3935.6 4967,3933.5 4960.5,3932.1 4954,3931.5 4947.4,3931.7 4940.9,3932.7 4934.5,3934.4 4928.4,3936.9 4922.6,3940.1 4917.2,3943.9 4912.4,3948.4 4908.1,3953.4 4904.4,3958.9 4901.4,3964.7 4899.1,3970.9 4897.5,3977.3 4896.7,3983.9 4896.7,3990.5 4897.5,3997 4899.1,4003.4 4901.4,4009.6 4904.4,4015.5 4908.1,4021 4912.4,4026 4917.2,4030.4 4922.6,4034.3 4928.4,4037.4 4934.5,4039.9 4940.9,4041.7 4947.4,4042.6 4954,4042.8 4960.5,4042.2 4967,4040.9 4973.2,4038.8 4979.2,4035.9 4984.8,4032.4 4989.9,4028.3 4994.5,4023.5 4998.5,4018.3 5001.9,4012.6 5004.5,4006.6 5006.4,4000.2 5007.6,3993.8
  region: 5008,6113.2 5007.6,6106.6 5006.4,6100.1 5004.5,6093.8 5001.9,6087.7 4998.5,6082.1 4994.5,6076.8 4989.9,6072.1 4984.8,6067.9 4979.2,6064.4 4973.2,6061.6 4967,6059.4 4960.5,6058.1 4954,6057.5 4947.4,6057.7 4940.9,6058.7 4934.5,6060.4 4928.4,6062.9 4922.6,6066.1 4917.2,6069.9 4912.4,6074.4 4908.1,6079.4 4904.4,6084.8 4901.4,6090.7 4899.1,6096.9 4897.5,6103.3 4896.7,6109.9 4896.7,6116.5 4897.5,6123 4899.1,6129.4 4901.4,6135.6 4904.4,6141.5 4908.1,6146.9 4912.4,6151.9 4917.2,6156.4 4922.6,6160.2 4928.4,6163.4 4934.5,6165.9 4940.9,6167.6 4947.4,6168.6 4954,6168.8 4960.5,6168.2 4967,6166.9 4973.2,6164.8 4979.2,6161.9 4984.8,6158.4 4989.9,6154.2 4994.5,6149.5 4998.5,6144.3 5001.9,6138.6 5004.5,6132.5 5006.4,6126.2 5007.6,6119.7
  region: 5008,6113.2 5007.6,6106.6 5006.4,6100.1 5004.5,6093.8 5001.9,6087.7 4998.5,6082.1 4994.5,6076.8 4989.9,6072.1 4984.8,6067.9 4979.2,6064.4 4973.2,6061.6 4967,6059.4 4960.5,6058.1 4954,6057.5 4947.4,6057.7 4940.9,6058.7 4934.5,6060.4 4928.4,6062.9 4922.6,6066.1 4917.2,6069.9 4912.4,6074.4 4908.1,6079.4 4904.4,6084.8 4901.4,6090.7 4899.1,6096.9 4897.5,6103.3 4896.7,6109.9 4896.7,6116.5 4897.5,6123 4899.1,6129.4 4901.4,6135.6 4904.4,6141.5 4908.1,6146.9 4912.4,6151.9 4917.2,6156.4 4922.6,6160.2 4928.4,6163.4 4934.5,6165.9 4940.9,6167.6 4947.4,6168.6 4954,6168.8 4960.5,6168.2 4967,6166.9 4973.2,6164.8 4979.2,6161.9 4984.8,6158.4 4989.9,6154.2 4994.5,6149.5 4998.5,6144.3 5001.9,6138.6 5004.5,6132.5 5006.4,6126.2 5007.6,6119.7
  region: 3669.4,6113.2 3669,6106.6 3667.9,6100.1 3665.9,6093.8 3663.3,6087.7 3659.9,6082.1 3655.9,6076.8 3651.3,6072.1 3646.2,6067.9 3640.6,6064.4 3634.7,6061.6 3628.4,6059.4 3622,6058.1 3615.4,6057.5 3608.8,6057.7 3602.3,6058.7 3595.9,6060.4 3589.8,6062.9 3584,6066.1 3578.7,6069.9 3573.8,6074.4 3569.5,6079.4 3565.8,6084.8 3562.8,6090.7 3560.5,6096.9 3558.9,6103.3 3558.2,6109.9 3558.2,6116.5 3558.9,6123 3560.5,6129.4 3562.8,6135.6 3565.8,6141.5 3569.5,6146.9 3573.8,6151.9 3578.7,6156.4 3584,6160.2 3589.8,6163.4 3595.9,6165.9 3602.3,6167.6 3608.8,6168.6 3615.4,6168.8 3622,6168.2 3628.4,6166.9 3634.7,6164.8 3640.6,6161.9 3646.2,6158.4 3651.3,6154.2 3655.9,6149.5 3659.9,6144.3 3663.3,6138.6 3665.9,6132.5 3667.9,6126.2 3669,6119.7
  region: 3669.4,6113.2 3669,6106.6 3667.9,6100.1 3665.9,6093.8 3663.3,6087.7 3659.9,6082.1 3655.9,6076.8 3651.3,6072.1 3646.2,6067.9 3640.6,6064.4 3634.7,6061.6 3628.4,6059.4 3622,6058.1 3615.4,6057.5 3608.8,6057.7 3602.3,6058.7 3595.9,6060.4 3589.8,6062.9 3584,6066.1 3578.7,6069.9 3573.8,6074.4 3569.5,6079.4 3565.8,6084.8 3562.8,6090.7 3560.5,6096.9 3558.9,6103.3 3558.2,6109.9 3558.2,6116.5 3558.9,6123 3560.5,6129.4 3562.8,6135.6 3565.8,6141.5 3569.5,6146.9 3573.8,6151.9 3578.7,6156.4 3584,6160.2 3589.8,6163.4 3595.9,6165.9 3602.3,6167.6 3608.8,6168.6 3615.4,6168.8 3622,6168.2 3628.4,6166.9 3634.7,6164.8 3640.6,6161.9 3646.2,6158.4 3651.3,6154.2 3655.9,6149.5 3659.9,6144.3 3663.3,6138.6 3665.9,6132.5 3667.9,6126.2 3669,6119.7
  lines w0.1: 3558.2,3983.9 3558.9,3977.3 3560.5,3970.9 3562.8,3964.7 3565.8,3958.9 3569.5,3953.4 3573.8,3948.4 3578.7,3943.9 3584,3940.1 3589.8,3936.9 3595.9,3934.4 3602.3,3932.7 3608.8,3931.7 3615.4,3931.5 3622,3932.1 3628.4,3933.5 3634.7,3935.6 3640.6,3938.4 3646.2,3941.9 3651.3,3946.1 3655.9,3950.8 3659.9,3956.1 3663.3,3961.7 3665.9,3967.8 3667.9,3974.1 3669,3980.6 3669.4,3987.2 3669,3993.8 3667.9,4000.2 3665.9,4006.6 3663.3,4012.6 3659.9,4018.3 3655.9,4023.5 3651.3,4028.3 3646.2,4032.4 3640.6,4035.9 3634.7,4038.8 3628.4,4040.9 3622,4042.2 3615.4,4042.8 3608.8,4042.6 3602.3,4041.7 3595.9,4039.9 3589.8,4037.4 3584,4034.3 3578.7,4030.4 3573.8,4026 3569.5,4021 3565.8,4015.5 3562.8,4009.6 3560.5,4003.4 3558.9,3997 3558.2,3990.5 3558.2,3983.9 ; 3558.2,6109.9 3558.9,6103.3 3560.5,6096.9 3562.8,6090.7 3565.8,6084.8 3569.5,6079.4 3573.8,6074.4 3578.7,6069.9 3584,6066.1 3589.8,6062.9 3595.9,6060.4 3602.3,6058.7 3608.8,6057.7 3615.4,6057.5 3622,6058.1 3628.4,6059.4 3634.7,6061.6 3640.6,6064.4 3646.2,6067.9 3651.3,6072.1 3655.9,6076.8 3659.9,6082.1 3663.3,6087.7 3665.9,6093.8 3667.9,6100.1 3669,6106.6 3669.4,6113.2 3669,6119.7 3667.9,6126.2 3665.9,6132.5 3663.3,6138.6 3659.9,6144.3 3655.9,6149.5 3651.3,6154.2 3646.2,6158.4 3640.6,6161.9 3634.7,6164.8 3628.4,6166.9 3622,6168.2 3615.4,6168.8 3608.8,6168.6 3602.3,6167.6 3595.9,6165.9 3589.8,6163.4 3584,6160.2 3578.7,6156.4 3573.8,6151.9 3569.5,6146.9 3565.8,6141.5 3562.8,6135.6 3560.5,6129.4 3558.9,6123 3558.2,6116.5 3558.2,6109.9 ; 4896.7,3983.9 4897.5,3977.3 4899.1,3970.9 4901.4,3964.7 4904.4,3958.9 4908.1,3953.4 4912.4,3948.4 4917.2,3943.9 4922.6,3940.1 4928.4,3936.9 4934.5,3934.4 4940.9,3932.7 4947.4,3931.7 4954,3931.5 4960.5,3932.1 4967,3933.5 4973.2,3935.6 4979.2,3938.4 4984.8,3941.9 4989.9,3946.1 4994.5,3950.8 4998.5,3956.1 5001.9,3961.7 5004.5,3967.8 5006.4,3974.1 5007.6,3980.6 5008,3987.2 5007.6,3993.8 5006.4,4000.2 5004.5,4006.6 5001.9,4012.6 4998.5,4018.3 4994.5,4023.5 4989.9,4028.3 4984.8,4032.4 4979.2,4035.9 4973.2,4038.8 4967,4040.9 4960.5,4042.2 4954,4042.8 4947.4,4042.6 4940.9,4041.7 4934.5,4039.9 4928.4,4037.4 4922.6,4034.3 4917.2,4030.4 4912.4,4026 4908.1,4021 4904.4,4015.5 4901.4,4009.6 4899.1,4003.4 4897.5,3997 4896.7,3990.5 4896.7,3983.9 ; 4896.7,6109.9 4897.5,6103.3 4899.1,6096.9 4901.4,6090.7 4904.4,6084.8 4908.1,6079.4 4912.4,6074.4 4917.2,6069.9 4922.6,6066.1 4928.4,6062.9 4934.5,6060.4 4940.9,6058.7 4947.4,6057.7 4954,6057.5 4960.5,6058.1 4967,6059.4 4973.2,6061.6 4979.2,6064.4 4984.8,6067.9 4989.9,6072.1 4994.5,6076.8 4998.5,6082.1 5001.9,6087.7 5004.5,6093.8 5006.4,6100.1 5007.6,6106.6 5008,6113.2 5007.6,6119.7 5006.4,6126.2 5004.5,6132.5 5001.9,6138.6 4998.5,6144.3 4994.5,6149.5 4989.9,6154.2 4984.8,6158.4 4979.2,6161.9 4973.2,6164.8 4967,6166.9 4960.5,6168.2 4954,6168.8 4947.4,6168.6 4940.9,6167.6 4934.5,6165.9 4928.4,6163.4 4922.6,6160.2 4917.2,6156.4 4912.4,6151.9 4908.1,6146.9 4904.4,6141.5 4901.4,6135.6 4899.1,6129.4 4897.5,6123 4896.7,6116.5 4896.7,6109.9
  lines w10: 3495.6,3869.1 3495.6,6231.3 5070.4,6231.3 5070.4,3869.1 3495.6,3869.1

## Silkscreen, mask and mechanical layers (free items; w line width, h text height)
Top Silkscreen Layer:
  text "It's not a bug, it's a feature" at 4477.8,5020 h31.5 r90
  text "ANIRBAN /         ⚡ MADE THIS ⚡" at 3991.9,4644.6 h59.1
Bottom Silkscreen Layer:
  drawing of 20 lines, arcs and shapes, not listed
  text "┌─────────────────┐ / │ github.com/anirban185          │ / │ phukonanirban7@gmail.com │ / └─────────────────┘" at 3892.9,6041.3 h59.1 r90
  text "No user serviceable parts inside" at 3740.9,4030.2 h35.4 r180
Mechanical Layer:
  drawing of 212 lines, arcs and shapes, not listed